# Altium PCB PCB1.PcbDoc
Units mm, origin at the board's own origin, x right, y up, seen from the top; angles counter-clockwise.
Board outline 100.25 x 100.25 mm, 2 copper layers (Top Layer, Bottom Layer); 62 components, 56 nets, 259 pads, 134 vias.
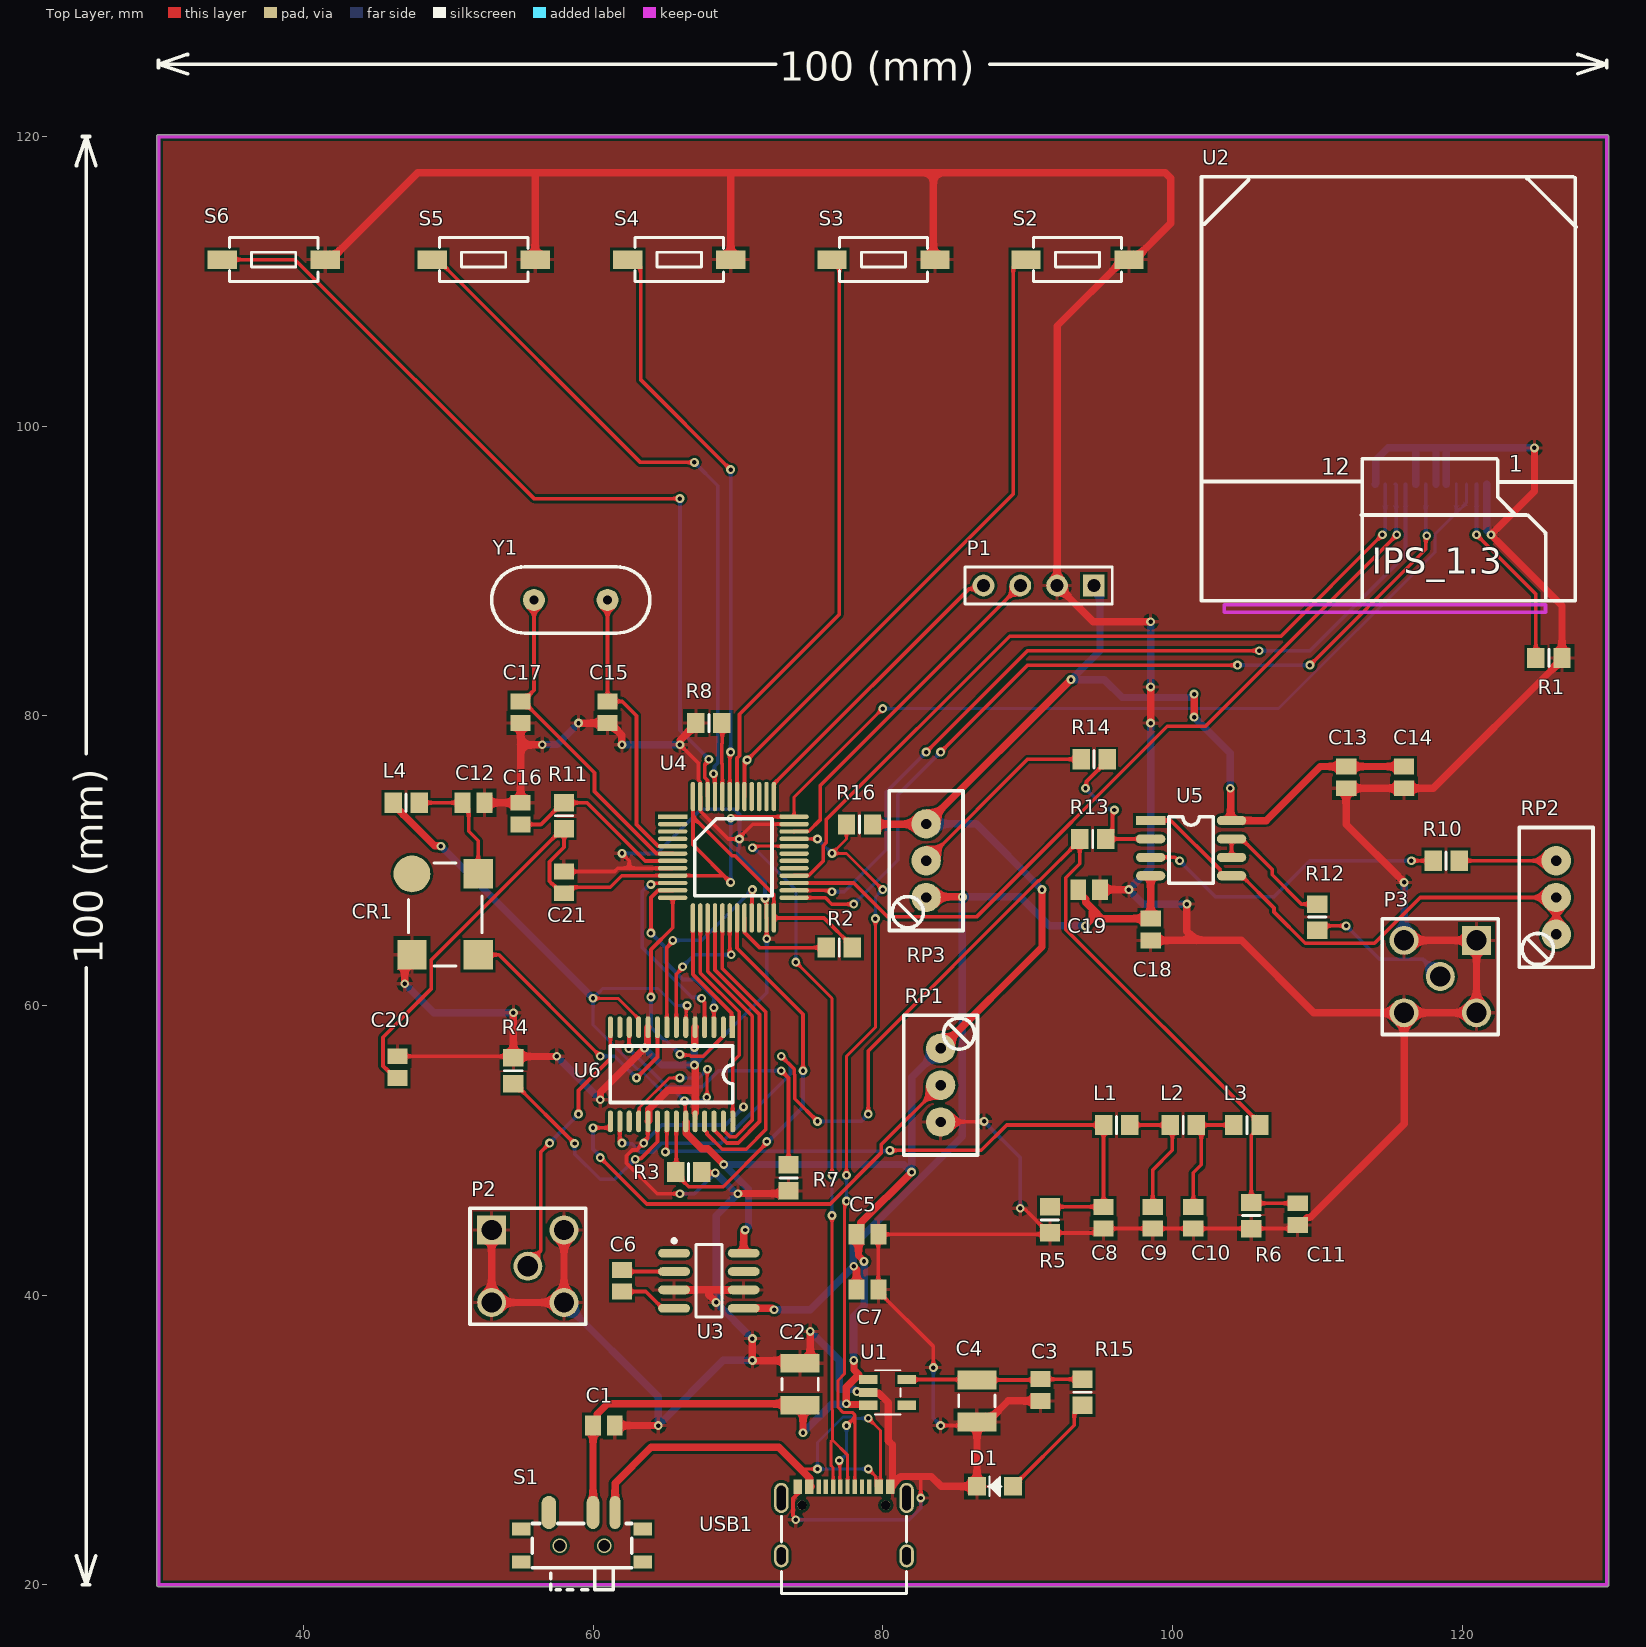
[diagram p0: Top Layer view]
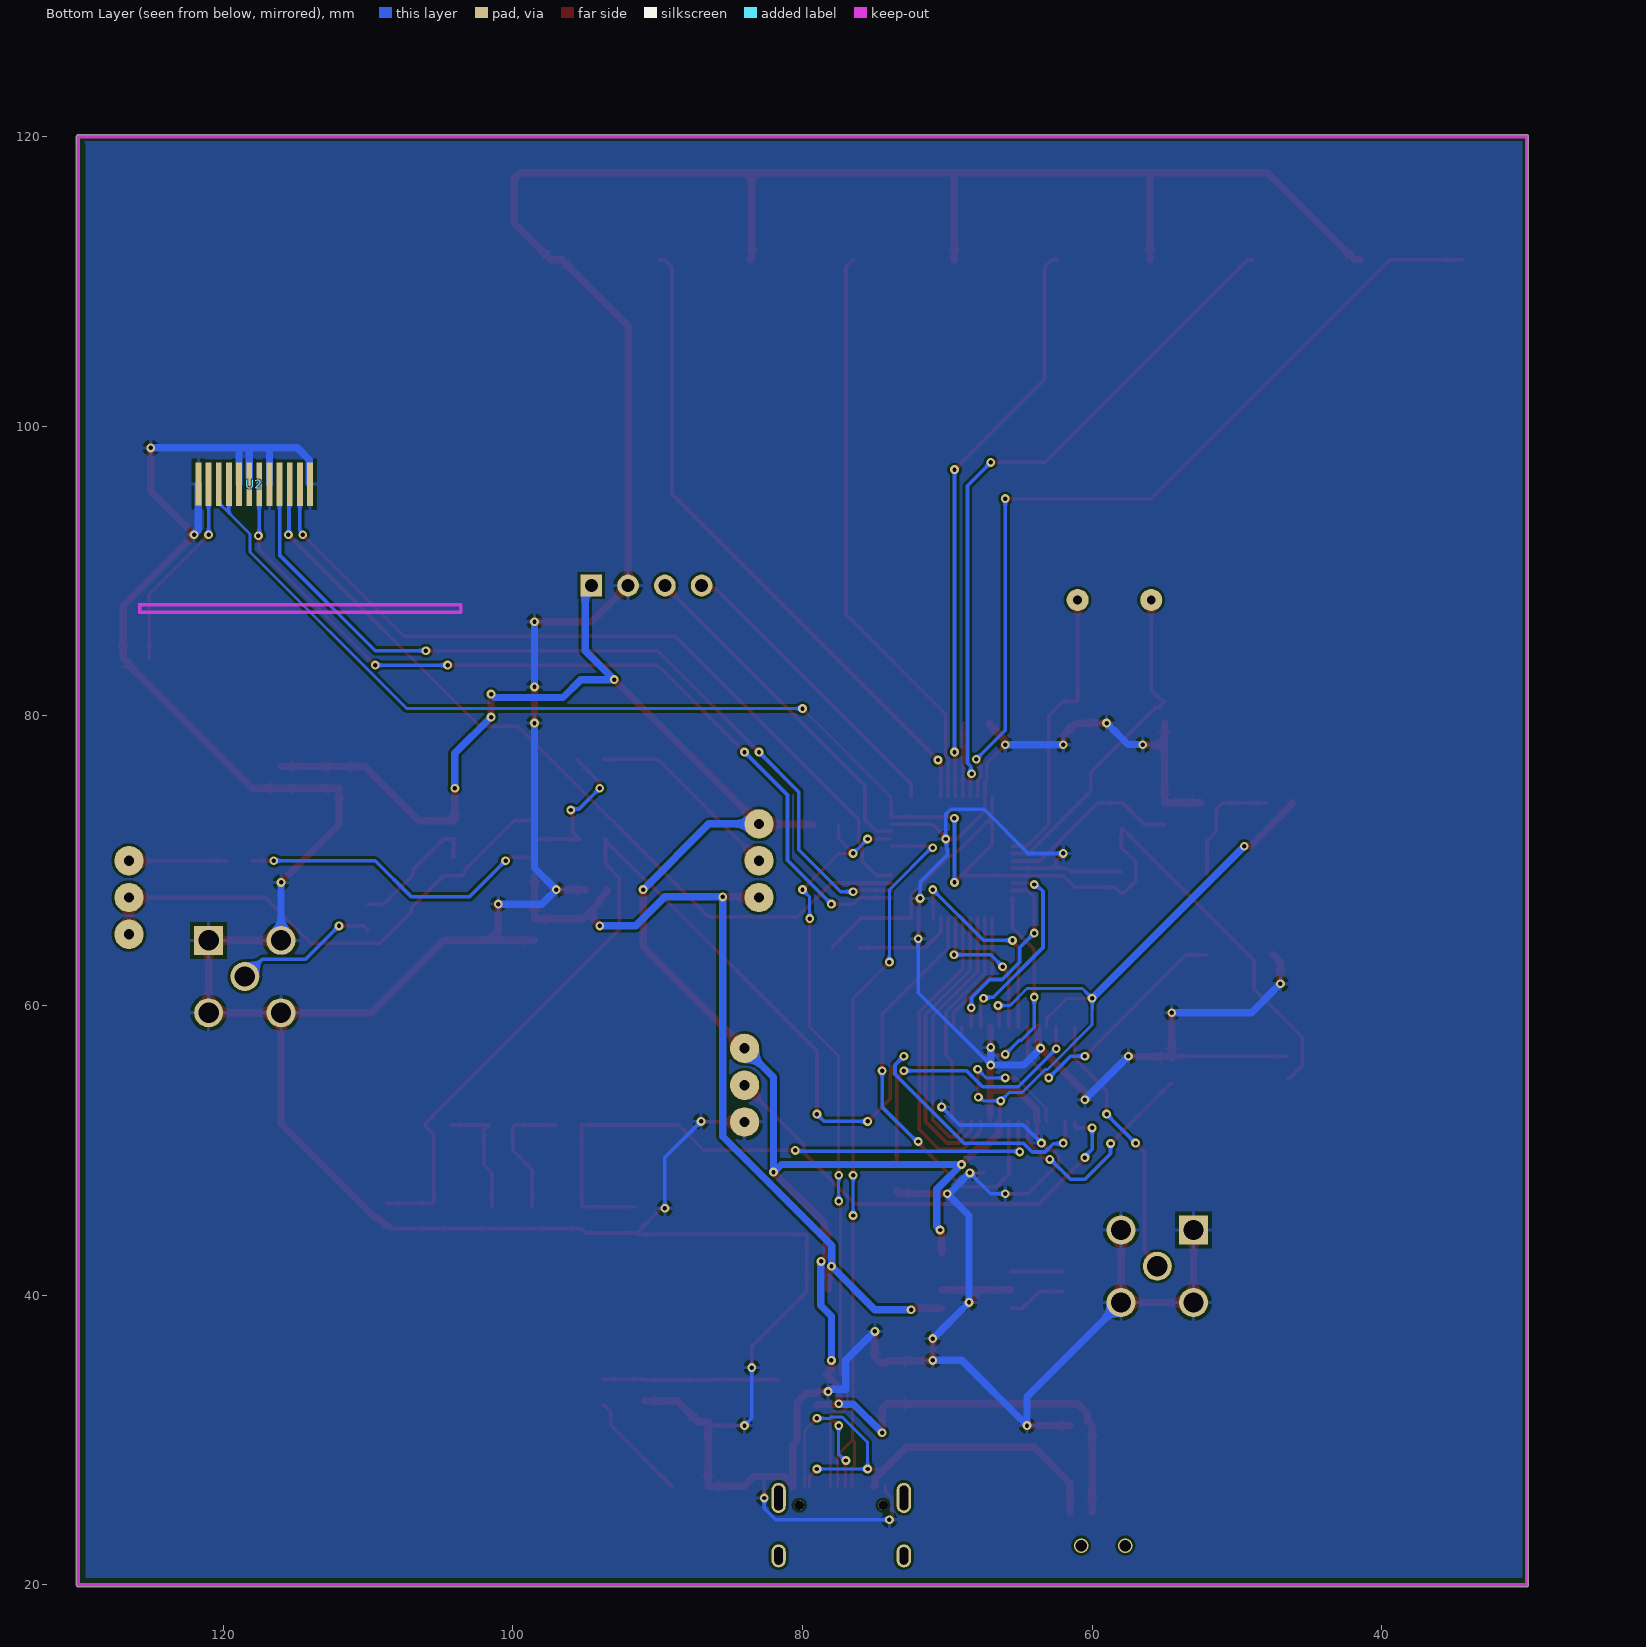
[diagram p1: Bottom Layer view, seen from below]

## Layer stack, top to bottom
Top Solder: solder mask 0.0102, Solder Resist, Dk 3.5
Top Layer: signal copper 0.0356
Dielectric 1: dielectric 0.32, FR-4, Dk 4.8
Bottom Layer: signal copper 0.0356
Bottom Solder: solder mask 0.0102, Solder Resist, Dk 3.5

## Board outline
29.873,20 ccw(c30,20) 30,19.873 130,19.873 ccw(c130,20) 130.127,20 130.127,120 ccw(c130,120) 130,120.127 30,120.127 ccw(c30,120) 29.873,120

## Design rules (kind name [scope] priority, off if disabled: settings)
Clearance [All] p1: gap=0.178 ignorepadtopadclearanceinfootprint=FALSE
PolygonConnect [All] p1: connectstyle=Relief reliefconductorwidth=0.254 reliefentries=4 polygonreliefangle="90 Angle" airgapwidth=0.254
RoutingVias [All] p1: holewidth=0.305 width=0.61 viastyle="Through Hole" minholewidth=0.305 minwidth=0.61 maxholewidth=0.305 maxwidth=0.61
SolderMaskExpansion [All] p1: expansion=0.102 istentingtop=FALSE
Width [All] p1: maxlimit=0.508 minlimit=0.203 preferedwidth=0.203
30 further rules are at their usual default settings.

## Components (designator, comment, footprint, x,y, rotation, side; value= is the part's Value field where it differs from the comment)
C1 "Cap104" C0805 60.75,31 r180 top
C2 "Cap Pol1 22UF" C1210_N 74.3,33.85 r90 top
C3 "Cap 104" C0805 90.9,33.45 r90 top
C4 "Cap Pol1 22UF" C1210_N 86.5,32.7 r270 top
C5 "Cap 106" C0805 78.95,44.2 r180 top
C6 "106" C0805 62,41 r90 top
C7 "Cap 106" C0805 78.95,40.4 r180 top
C8 "Cap 33pF" C0805 95.25,45.35 r90 top
C9 "Cap 22pF" C0805 98.65,45.35 r90 top
C10 "Cap 22pF" C0805 101.45,45.35 r90 top
C11 "Cap 22pF" C0805 108.65,45.6 r90 top
C12 "Cap 104" C0805 51.75,74 r0 top
C13 "106" C0805 112,75.75 r270 top
C14 "106" C0805 116,75.75 r270 top
C15 "Cap 20pF" C0805 61,80.25 r90 top
C16 "Cap 104" C0805 55,73.25 r270 top
C17 "Cap 20pF" C0805 55,80.25 r90 top
C18 "Cap" C0805 98.5,65.25 r270 top
C19 "Cap" C0805 94.25,68 r0 top
C20 "104" C0805 46.5,55.75 r270 top
C21 "104" C0805 58,68.5 r270 top
CR1 "30MHZ" CRYSTAL-SMT-5X7 47.5,69.088 r270 top
D1 "LED2" D0805+ 89,26.8 r180 top
L1 "Inductor 470mH" 6-0805_N 96.15,51.75 r0 top
L2 "Inductor 390nH" 6-0805_N 100.75,51.75 r0 top
L3 "Inductor 390nH" 6-0805_N 105.15,51.75 r0 top
L4 "Inductor" 6-0805_N 47.1,74 r180 top
P1 "Header 4" HDR1X4 94.58,89 r180 top
P2 "SMA" SMA-KE 55.5,42 r90 top
P3 "SMA" SMA-KE 118.5,62 r0 top
R1 "Res2 10" 6-0805_N 126,84 r180 top
R2 "10K" 6-0805_N 77,64 r0 top
R3 "10K" 6-0805_N 66.6,48.5 r0 top
R4 "25" 6-0805_N 54.5,55.5 r270 top
R5 "Res 200" 6-0805_N 91.55,45.2 r90 top
R6 "Res 200" 6-0805_N 105.45,45.5 r90 top
R7 "3.9K" 6-0805_N 73.5,48.1 r90 top
R8 "10K" 6-0805_N 68,79.5 r0 top
R10 "49.9" 6-0805_N 118.9,70 r0 top
R11 "10K" 6-0805_N 58,73.1 r270 top
R12 "49.9" 6-0805_N 110,66.1 r270 top
R13 "49.9" 6-0805_N 94.5,71.5 r0 top
R14 "49.9" 6-0805_N 94.6,77 r0 top
R15 "Res2 10K" 6-0805_N 93.8,33.3 r90 top
R16 "10K" 6-0805_N 78.4,72.5 r180 top
RP1 "POT2" VR7 84,54.5 r90 top
RP2 "1K" VR7 126.5,67.46 r270 top
RP3 "10K" VR7 83,70 r270 top
S1 "SW SPDT" SW-SPDT-7P 61.524,25 r180 top
S2 "KEY" SW-MINI 96.5,111.5 r180 top
S3 "KEY" SW-MINI 83.104,111.5 r180 top
S4 "KEY" SW-MINI 69,111.5 r180 top
S5 "KEY" SW-MINI 55.5,111.5 r180 top
S6 "KEY" SW-MINI 41,111.5 r180 top
U1 "XC6219B332" SOT23-5L 79,33.289 r270 top
U2 "1.3寸TFT液晶" 1.3-TFT-TPS 121.709,96.008 r270 top
U3 "ICL7660" SO8_N 68,41 r0 top
U4 "STM32F103C8" TQFP-48 65.5,73.032 r0 top
U5 "OPA2690" SO-8 98.5,72.77 r0 top
U6 "AD9851" TSSOP28 69.65,58.5 r270 top
USB1 "TYPE-C" TYPE-C 81.65,22 r180 top
Y1 "XTAL" XTAL2 58.46,88 r0 top

## Footprints (in the part's own frame and the unit in brackets; to place one, negate y for a bottom-side part, rotate by r counter-clockwise, add the part's x,y. Pads: shape width x height; smd on the part's side, far side on the other; paste and mask are expansions set on the pad)
1.3-TFT-TPS [mm]
  rect 3x0.4 smd far side: 1(0,0) 2(0.008,-0.709) 3(0.008,-1.409) 4(0.008,-2.109) 5(0.008,-2.809) 6(0.008,-3.509) 7(0.008,-4.209) 8(0.008,-4.909) 9(0.008,-5.609) 10(0.008,-6.309) 11(0.008,-7.009) 12(0.008,-7.709)
  Keep-Out Layer lines w0.254: 8.847,-18.123 8.339,-18.123 8.339,4.051 8.847,4.051 8.847,-18.123
  silkscreen extent -21.22,-19.72 8.06,6.16
6-0805_N [mm]
  rect 1.2x1.4 smd: 1(-0.9,0) 2(0.9,0)
  silkscreen extent 0,-0.6 0,0.6, body extent -1.07,-0.7 1.07,0.7, height 0.7
C0805 [mm]
  rect 1.1x1.4 smd: 1(-0.75,0) 2(0.75,0)
  body extent -1.1,-0.73 1.1,0.72, height 1.4
C1210_N [mm]
  rect 1.3x2.7 smd: 1(-1.45,0) 2(1.45,0)
  silkscreen extent -0.4,-1.25 0.4,1.25, body extent -1.7,-1.35 1.7,1.35, height 1.5
CRYSTAL-SMT-5X7 [mil]
  round 100 smd: 1(0,0)
  rect 80x80 smd: 4(220,0) 5(220,180) 8(0,180)
  silkscreen extent -30,-10 250,190
D0805+ [mil]
  rect 50x50 smd: A(0,0) K(98,0)
  silkscreen extent 31,-27 68,27
HDR1X4 [mm]
  rect 1.5x1.5 hole 0.9: 1(0,0)
  round 1.5 hole 0.9: 2(2.54,0) 3(5.08,0) 4(7.62,0)
  silkscreen extent -1.27,-1.27 8.89,1.27
SMA-KE [mm]
  round 2 hole 1.4: 1(0,0) 3(2.5,-2.5) 4(-2.5,-2.5) 5(-2.5,2.5)
  rect 2x2 hole 1.4: 2(2.5,2.5)
  silkscreen extent -4,-4 4,4
SO8_N [mm]
  oval 2.2x0.6 smd: 1(-2.4,1.905) 2(-2.4,0.635) 3(-2.4,-0.635) 4(-2.4,-1.905) 5(2.4,-1.905) 6(2.4,-0.635) 7(2.4,0.635) 8(2.4,1.905)
  silkscreen extent -2.52,-2.5 0.9,2.88, body extent -2,-2.5 2,2.5, height 1.75
SO-8 [mil]
  rect 80x25 smd: 1(0,0)
  oval 80x25 smd: 2(0,-50) 3(0,-100) 4(0,-150) 5(220,-150) 6(220,-100) 7(220,-50) 8(220,0)
  silkscreen extent 50,-170 170,10
SOT23-5L [mil]
  rect 25x50 smd: 1(-35,0) 2(0,0) 3(35,0) 4(35,105) 5(-35,105)
  silkscreen extent -60,18 60,88
SW-MINI [mil]
  rect 80x50 smd: 1(-20,0) 2(260,0)
  silkscreen extent 0,-60 240,60
SW-SPDT-7P [mil]
  oval 30x90 smd: 1(0,0)
  oval 35x90 smd: 2(60,0)
  oval 40x90 smd: 3(180,0)
  rect 50x35 smd: 4(255,45) 5(255,135) 6(-75,135) 7(-75,45)
  silkscreen extent -45,30 225,210
TQFP-48 [mil]
  rect 80x12 smd: 1(0,0)
  oval 80x12 smd: 2(0,-20) 3(0,-40) 4(0,-60) 5(0,-80) 6(0,-100) 7(0,-120) 8(0,-140) 9(0,-160) 10(0,-180) 11(0,-200) 12(0,-220) 25(330,-220) 26(330,-200) 27(330,-180) 28(330,-160) 29(330,-140) 30(330,-120) 31(330,-100) 32(330,-80) 33(330,-60) 34(330,-40) 35(330,-20) 36(330,0)
  oval 12x80 smd: 13(55,-275) 14(75,-275) 15(95,-275) 16(115,-275) 17(135,-275) 18(155,-275) 19(175,-275) 20(195,-275) 21(215,-275) 22(235,-275) 23(255,-275) 24(275,-275) 37(275,55) 38(255,55) 39(235,55) 40(215,55) 41(195,55) 42(175,55) 43(155,55) 44(135,55) 45(115,55) 46(95,55) 47(75,55) 48(55,55)
  silkscreen extent 60,-215 270,-5
TSSOP28 [mm]
  rect 1.5x0.35 smd: 1(-0.011,-0.037)
  oval 1.5x0.35 smd: 2(0,-0.65) 3(0,-1.3) 4(0,-1.95) 5(0,-2.6) 6(0,-3.25) 7(0,-3.9) 8(0,-4.55) 9(0,-5.2) 10(0,-5.85) 11(0,-6.5) 12(0,-7.15) 13(0,-7.8) 14(0,-8.45) 15(6.5,-8.45) 16(6.5,-7.8) 17(6.5,-7.15) 18(6.5,-6.5) 19(6.5,-5.85) 20(6.5,-5.2) 21(6.5,-4.55) 22(6.5,-3.9) 23(6.5,-3.25) 24(6.5,-2.6) 25(6.5,-1.95) 26(6.5,-1.3) 27(6.5,-0.65) 28(6.5,0)
  silkscreen extent 1.3,-8.45 5.2,0
TYPE-C [mm]
  round 0.65 hole 0.65: 0(1.435,-3.5) 0(7.215,-3.5)
  oval 1x1.6 hole 0.6 slot 1.2 at 90 deg: 1(0,0) 2(8.65,0)
  oval 1x2.1 hole 0.6 slot 1.7 at 90 deg: 3(8.65,-4) 4(0,-4)
  rect 0.3x1 smd: A1(7.675,-4.79) A4(6.875,-4.79) A5(5.575,-4.79) A6(4.575,-4.79) A7(4.075,-4.79) A8(3.075,-4.79) A9(1.775,-4.79) A12(0.975,-4.79) B1(1.275,-4.79) B4(2.075,-4.79) B5(2.575,-4.79) B6(3.575,-4.79) B7(5.075,-4.79) B8(6.075,-4.79) B9(6.575,-4.79) B12(7.375,-4.79)
  silkscreen extent 0,-2.74 8.65,2.6
VR7 [mil]
  round 80 hole 28: 1(-100,0) 2(100,0) 3(0,0)
  silkscreen extent -190,-100 190,100
XTAL2 [mil]
  round 60 hole 24: 1(-100,0) 2(100,0)
  silkscreen extent -215,-90 215,90

## Part data
C1 C3 C6 C7 C8 C9 C10 C11 C12 C13 C14 C15 C16 C17 C20 C21: library part Cap, "Capacitor", LatestRevisionDate=17-Jul-2002, LatestRevisionNote="Re-released for DXP Platform.", PackageDescription="Radial Cap, Thru-Hole; 2 Leads; 0.3 in Pin Spacing", PackageReference=RAD-0.3, Published=8-Jun-2000, Publisher="Altium Limited"
C2 C4: library part "Cap Pol1", "Polarized Capacitor (Radial)", LatestRevisionDate=17-Jul-2002, LatestRevisionNote="Re-released for DXP Platform.", PackageDescription="Polarized Capacitor (Radial); 2 Leads", PackageReference=RB7.6-15, Published=8-Jun-2000, Publisher="Altium Limited"
C5: library part Cap, "106", LatestRevisionDate=17-Jul-2002, LatestRevisionNote="Re-released for DXP Platform.", PackageDescription="Radial Cap, Thru-Hole; 2 Leads; 0.3 in Pin Spacing", PackageReference=RAD-0.3, Published=8-Jun-2000, Publisher="Altium Limited"
C18 C19: "Capacitor", LatestRevisionDate=17-Jul-2002, LatestRevisionNote="Re-released for DXP Platform.", PackageDescription="Radial Cap, Thru-Hole; 2 Leads; 0.3 in Pin Spacing", PackageReference=RAD-0.3, Published=8-Jun-2000, Publisher="Altium Limited"
CR1: library part CRYSTAL-DIP8
D1: "Typical RED, GREEN, YELLOW, AMBER GaAs LED", LatestRevisionDate=17-Jul-2002, LatestRevisionNote="Re-released for DXP Platform.", PackageDescription="SM LED; 2 Flat Leads", PackageReference=3.2X1.6X1.1, PackageVersion=Feb-2002, Published=8-Jun-2000, Publisher="Altium Limited"
L1 L2 L3: library part Inductor, "Inductor", Code_IEC=1005, Code_JEITA=0402, LatestRevisionDate=29-May-2009, LatestRevisionNote="IPC-7351 Footprint Added.", PackageDescription="Chip Inductor", PackageReference=0402-A, Published=8-Jun-2000, Publisher="Altium Limited"
P1: "Header, 4-Pin", LatestRevisionDate=17-Jul-2002, LatestRevisionNote="Re-released for DXP Platform.", Publisher="Altium Limited"
R1 R2 R3 R4 R5 R6 R7 R8 R10 R11 R12 R13 R14 R15 R16: library part Res2, "Resistor", LatestRevisionDate=17-Jul-2002, LatestRevisionNote="Re-released for DXP Platform.", PackageDescription="Axial Device, Thru-Hole; 2 Leads; 0.4 in Pin Spacing", PackageReference=AXIAL-0.4, Published=8-Jun-2000, Publisher="Altium Limited"
RP1: "Potentiometer"
RP2 RP3: library part POT2, "Potentiometer"
S2 S3 S4 S5 S6: library part SW-PB, "Switch", LatestRevisionDate=17-Jul-2002, LatestRevisionNote="Re-released for DXP Platform.", PackageDescription="Switch; 2 Leads", PackageReference=SPST-2, Published=24-Mar-1999, Publisher="Altium Limited"
U1: library part XC6219
U4: "Flaah:64/RAM:20/IO:36", BOM名称=32位STM单片机, 学习资源=www.ooocke.com, 版权归属=源创客
Y1: "Crystal Oscillator", LatestRevisionDate=17-Jul-2002, LatestRevisionNote="Re-released for DXP Platform.", PackageDescription="Crystal, Thru-Hole; 2 Leads; Body 3.1 x 8.2 mm (Dia.xH)", PackageReference=R38, Published=8-Jun-2000, Publisher="Altium Limited"
L4: Code_IEC=1005, Code_JEITA=0402, LatestRevisionDate=29-May-2009, LatestRevisionNote="IPC-7351 Footprint Added.", PackageDescription="Chip Inductor", PackageReference=0402-A, Published=8-Jun-2000, Publisher="Altium Limited"

## Via types
v1: diameter 0.61, hole 0.305, Top Layer to Bottom Layer, 132 vias
v2: diameter 1, hole 0.8, Top Layer to Bottom Layer, 2 vias

## Nets (pads, with @x,y where several pads share a name; then routed paths per layer and width w, separated by ;. In a path a pad name is that pad's centre, name@x,y a point inside that pad or via, vN(x,y) a via of type N, cw(c..) or ccw(c..) an arc to the next point about the centre after c; other vN are vias at no path point)
+5: C1.2 C2.1 C5.2 C13.1 C14.1 L4.2 P1.1 R16.1 RP1.2 RP3.1 S1.2 U1.1 U1.3 U3.8 U5.8 U6.6 U6.11 U6.18 U6.23 | length 217.2
  Top Layer w0.203: v1(60,60.5) 61.725,60.5 63.15,59.075 U6.11 ; U6.18 63.178,52.028 63.178,52.916 65.263,55 v1(66,55) ; v1(66.313,53.418) 66.372,53.359 66.372,52.028 U6.23 U6.23@66.443,51.957 ; U6.6 66.428,58.528 66.428,59.928 v1(66.5,60) ; v1(67.852,53.664) 67.878,53.69 67.878,55.569 v1(67.904,55.596)
  Top Layer w0.508: L4.2 46.2,73.9 46.905,73.195 46.905,73.184 49.07,71.019 49.481,71.019 v1(49.5,71) ; S1.2 C1.2 60.296,31.296 60.296,31.796 61,32.5 74.2,32.5 C2.1 74.5,32.2 v1(74.5,30.5) ; U6.23@66.443,51.957 66.443,51.174 67.51,50.107 67.935,50.107 v1(69.021,49.021) ; U3.8 70.4,44.373 70.5,44.473 v1(70.5,44.5) ; v1(78,35.5) 78.019,35.481 78.019,34.841 78.351,34.51 77.491,33.649 v1(77.491,32.5) 77.518,32.5 77.569,32.449 78.951,32.449 U1.3 ; v1(78.71,42.332) 78.71,42.359 78.331,42.738 78.331,44.069 C5.2 78.496,44.496 78.496,44.996 v1(82,48.5) ; R16.1 79.32,72.52 82.98,72.52 RP3.1 83.02,72.54 92.98,82.5 v1(93,82.5) ; RP1.2 91,64.04 v1(91,68) ; v1(101.5,79.916) v1(101.5,81.5) ; v1(104,75) 104.019,74.981 104.019,72.829 104.078,72.77 U5.8 106.483,72.77 110.213,76.5 C13.1 C14.1
  Bottom Layer w0.203: v1(66,55) 67.309,55 v1(67.904,55.596) ; v1(66.5,60) 65.658,60 64.49,61.168 60.668,61.168 v1(60,60.5) 60,58.674 63.09,55.584 63.242,55.584 64.842,53.984 65.747,53.984 v1(66.313,53.418) 67.496,53.418 67.742,53.664 v1(67.852,53.664)
  Bottom Layer w0.508: v1(49.5,71) v1(60,60.5) ; v1(70.5,44.5) 70.5,44.527 70.737,44.764 70.737,47.305 v1(69.021,49.021) 81.452,49.021 81.973,48.5 v1(82,48.5) 82,55.04 RP1.2 ; v1(74.5,30.5) 76.481,32.481 77.471,32.481 v1(77.491,32.5) ; v1(78,35.5) 78,38.548 78.737,39.285 78.737,42.305 v1(78.71,42.332) ; RP3.1 86.46,72.54 v1(91,68) ; P1.1 95,88.58 95,84.5 v1(93,82.5) 95.298,82.5 96.535,81.263 101.236,81.263 101.473,81.5 v1(101.5,81.5) ; v1(101.5,79.916) 104,77.416 v1(104,75)
+5VIN: S1.1 USB1.A4 USB1.A9 USB1.B4 USB1.B9 | length 35.2
  Top Layer w0.203: 74.413,27.913 74.5,28 v1(75.5,28) ; v1(79,28) 79.527,27.473 79.527,26.838 USB1.B4 ; v1(79,31.5) 79.842,30.658 79.842,26.823 USB1.A9
  Top Layer w0.508: S1.1 61.524,27.024 64,29.5 72.826,29.5 74.413,27.913 74.971,27.355 74.971,26.894 USB1.B9
  Bottom Layer w0.203: v1(79,28) v1(75.5,28) 75.5,29.826 77.258,31.584 78.032,31.584 78.116,31.5 v1(79,31.5)
-5: C7.2 C18.1 C19.1 RP3.2 U3.5 U5.4 | length 61.3
  Top Layer w0.508: U3.5 72.378,39.095 72.473,39 v1(72.5,39) ; v1(77.997,41.998) 77.997,41.971 78.2,41.768 C7.2 ; RP3.2 83.04,67.5 v1(85.5,67.5) ; C19.1 93.5,67.85 94.018,67.332 94.018,67.121 94.57,66.57 ; v1(94,65.5) 94,65.527 94.454,65.981 94.454,66.454 94.57,66.57 ; U5.4 C18.1 95.139,66 94.57,66.57
  Bottom Layer w0.508: v1(72.5,39) 75,39 77.997,41.997 v1(77.997,41.998) 77.997,42.026 77.974,42.049 77.974,43.432 85.5,50.958 v1(85.5,67.5) 89.5,67.5 91.5,65.5 v1(94,65.5)
AD9850-D0: U4.10 U6.4 | length 13.9
  Top Layer w0.254: v1(64,68.358) 64.096,68.358 64.188,68.45 65.49,68.45 U4.10 ; v1(67.5,60.5) 67.5,60.404 67.7,60.204 U6.4
  Bottom Layer w0.254: v1(64,68.358) 63.904,68.358 63.615,68.07 63.57,68.07 63.39,67.89 63.39,63.999 66.821,60.568 67.432,60.568 v1(67.5,60.5)
AD9850-D1: U4.11 U6.3 | length 13
  Top Layer w0.254: v1(64,65) 64,67.454 64.488,67.942 65.49,67.942 U4.11 ; v1(68.343,59.843) 68.346,59.839 68.346,58.504 U6.3
  Bottom Layer w0.254: v1(64,65) 64.998,64.002 64.998,63.002 66.205,61.795 67.068,61.795 68.334,60.529 68.334,59.852 v1(68.343,59.843)
AD9850-D2: U4.12 U6.2 | length 16.6
  Top Layer w0.254: v1(64,60.584) 64,63.862 65.5,65.362 U4.12 ; v1(66,56.627) 66.065,56.562 66.686,56.562 66.747,56.5 67.604,56.5 68.83,57.726 68.83,57.729 69,57.899 U6.2
  Bottom Layer w0.254: v1(64,60.584) 64,58.5 64.902,57.598 65.029,57.598 v1(66,56.627)
AD9850-D3: U4.13 U6.1 | length 8.7
  Top Layer w0.254: U4.13 66.897,62.151 69.565,59.483 69.565,58.559 U6.1
AD9850-D4: U4.14 U6.28 | length 15.3
  Top Layer w0.254: U4.14 67.405,62.253 70.092,59.566 70.092,56.56 69.65,56.118 U6.28
AD9850-D5: U4.15 U6.27 | length 18.5
  Top Layer w0.254: U4.15 67.913,62.356 71,59.269 71,52.096 69.849,50.945 69.451,50.945 69.17,51.226 69.17,51.229 69,51.399 U6.27
AD9850-D6: U4.16 U6.26 | length 20.1
  Top Layer w0.254: U6.26 68.35,51.399 68.52,51.229 68.52,51.226 69.233,50.513 70.028,50.513 71.5,51.986 71.5,59.38 68.421,62.459 U4.16
AD9850-D7: U4.17 U6.25 | length 21.9
  Top Layer w0.254: U6.25 67.7,51.399 67.87,51.229 67.87,51.13 68.918,50.082 70.582,50.082 71.932,51.432 71.932,59.558 68.929,62.561 U4.17
D/C: U2.7 U4.25 | length 61.1
  Top Layer w0.254: U4.25 76.044,67.444 76.488,67 v1(78,67) ; v1(84,77.5) 90,83.5 v1(104.5,83.5) ; v1(109.5,83.5) 117.5,91.5 117.5,92.374 v1(117.563,92.437)
  Bottom Layer w0.254: v1(78,67) 81.034,70.034 81.034,74.534 v1(84,77.5) ; v1(104.5,83.5) v1(109.5,83.5) ; U2.7 117.5,92.5 v1(117.563,92.437)
D\D\S\R\S\T\: R3.1 U4.19 U6.22 | length 30.1
  Top Layer w0.254: U6.22 65.75,48.55 R3.1 65.7,48.4 66.605,47.495 68.995,47.495 72,50.5 v1(72,50.61) ; U4.19 69.945,63.956 74.5,59.401 v1(74.5,55.5)
  Bottom Layer w0.254: v1(72,50.61) 72.11,50.61 74.5,53 v1(74.5,55.5)
DDSFQUP: U4.21 U6.8 | length 15.1
  Top Layer w0.254: U6.8 65.1,64.004 65.5,64.404 v1(65.5,64.5) ; U4.21@70.971,66.037 U4.21 70.971,66.057 70.971,67.971 v1(71,68)
  Bottom Layer w0.254: v1(65.5,64.5) 67.5,64.5 v1(71,68)
DDSWCLK: U4.18 U6.7 | length 10.6
  Top Layer w0.254: U6.7 65.75,62.154 66.181,62.585 v1(66.181,62.681) ; U4.18 69.437,63.698 69.539,63.596 v1(69.539,63.5)
  Bottom Layer w0.254: v1(66.181,62.681) 67,63.5 v1(69.539,63.5)
FOUT: C11.2 L3.2 R6.2 R13.1 U6.16 | length 85.9
  Top Layer w0.254: U6.16 61.85,50.746 62,50.596 v1(62,50.5) ; v1(73,56.5) 73.89,55.61 73.89,55.247 73.932,55.206 73.932,53.568 v1(75.5,52) ; v1(79,52.5) 79,56.862 90.747,68.61 90.81,68.61 R13.1@93.6,71.4 ; R13.1 R13.1@93.6,71.4 ; C11.2 105.5,46.35 R6.2 105.45,51.05 106.05,51.65 L3.2 106.05,51.85 92.645,65.255 92.645,68.826 93.6,69.781 R13.1@93.6,71.4
  Bottom Layer w0.254: v1(62,50.5) 62.048,50.452 62.686,50.452 63.247,49.89 64.138,49.89 64.747,50.5 68.862,50.5 73.61,55.247 73.61,55.89 v1(73,56.5) ; v1(75.5,52) 78.5,52 v1(79,52.5)
GND: C1.1 C2.2 C3.1 C4.2 C5.1 C7.1 C8.1 C9.1 C10.1 C11.1 C12.2 C13.2 C14.2 C15.1 C16.1 C17.1 C18.2 C19.2 C20.1 C21.1 CR1.4 D1.K P1.2 P2.2 P2.3 P2.4 P2.5 P3.2 P3.3 P3.4 P3.5 R1.1 R3.2 R4.1 R5.1 R6.1 R7.1 R8.1 RP1.1 S2.1 S3.1 S4.1 S5.1 S6.1 U1.2 U2.1 U2.5 U2.6 U2.8 U2.12 U3.3 U3.6 U4.8 U4.23 U4.35 U4.47 U6.5 U6.10 U6.19 U6.24 USB1.A1 USB1.A12 USB1.B1 USB1.B12 | length 588.2
  Top Layer w0.254: C20.1 R4.1@54.4,56.5 ; C21.1 61.485,69.25 61.711,69.476 62.5,69.476 ; v1(62,70.5) 62.5,70 62.5,69.476 ; U6.19 63.782,51.982 63.782,50.878 63.5,50.596 v1(63.5,50.5) 63.47,50.5 63,50.03 62.713,50.03 62.312,49.628 62.312,49.123 64.435,47 v1(66,47) ; U4.8 62.5,69.476 ; v1(66,78) 67.278,76.722 67.278,75.569 67.395,75.451 67.395,74.439 U4.47 67.415,74.419 67.415,73.417 69.332,71.5 v1@70,71.5 ; U6.24 U6.24@67.05,52.601 ; R3.2 67.557,48.443 68.404,48.443 v1@68.424,48.463 ; v1(70.11,71.5) v1@70,71.5 ; v1(71.878,67.396) 71.878,67.3 71.967,67.211 71.967,66.057 U4.23 71.987,66.037 71.987,64.623 v1(72,64.61) ; U4.35 71.024,72.524 v1@70,71.5 ; v1(74,24.5) 74,24.596 73.805,24.791 73.805,25.97 74.275,26.44 USB1.B12 ; 82.5,27.482 82.633,27.349 v1(82.633,26) ; v1(83.5,35) 83.5,36.45 79.7,40.25 C7.1 C5.1 91.45,44.2 R5.1 ; v1(84,31) 86.25,31 C4.2 ; RP1.1 84.02,51.98 86.98,51.98 v1(87,52) ; v1(89.5,46) 89.568,45.932 89.818,45.932 91.45,44.3 R5.1 ; C11.1 108.4,44.6 R6.1 C10.1 C9.1 96.95,44.6 C8.1 94.95,44.3 R5.1
  Top Layer w0.508: S6.1 41.889,111.5 47.889,117.5 56,117.5 ; v1(47,61.5) 47,63 CR1.4 ; C12.2 C16.1 55,78 ; P2.2 P2.5 P2.4 P2.3 ; R4.1@54.4,56.5 54.419,56.481 R4.1@54.5,56.481 ; R4.1 R4.1@54.5,56.481 ; v1(54.5,59.5) R4.1@54.5,56.481 ; C17.1 55,78 ; S5.1 56.008,117.492 56,117.5 ; v1(56.5,78) 55,78 ; v1(57.5,56.5) 57.481,56.481 R4.1@54.5,56.481 ; v1(59,79.5) C15.1 61.15,79.5 61.981,78.669 61.981,78.019 v1(62,78) ; v1(60.5,53.5) 60.519,53.519 60.519,54.019 v1(63.557,57.057) ; C1.1 v1(64.5,31) ; v1@63.757,57.284 63.757,58.457 U6.10 ; U6.19 63.843,52.043 63.843,52.826 65.171,54.154 67.05,54.154 ; U3.3 68,40.365 ; 66.019,78.319 67.1,79.4 R8.1 ; v1(67,55.89) 67,55.863 67.05,55.813 67.05,54.154 ; v1(67,57.11) 67.019,57.129 67.019,58.469 U6.5 ; U6.24@67.05,52.601 67.05,54.154 ; v1@68.424,48.463 v1(68.443,48.443) ; v1(68.5,39.5) 68.5,39.527 68,40.027 68,40.365 ; S4.1 69.508,117.492 69.5,117.5 ; v1(70,47) 70.019,47.019 73.319,47.019 R7.1 ; U3.6 68,40.365 ; v1(71,37) v1(71,35.5) 71.019,35.481 74.119,35.481 C2.2 74.604,35.3 75,35.696 v1(75,37.5) ; v1(78.227,33.344) 78.247,33.325 78.964,33.325 79.063,33.226 79.738,33.226 80.375,32.588 80.375,29.962 80.675,29.662 USB1.A12@80.675,26.932 ; USB1.A12 USB1.A12@80.675,26.932 ; S3.1 83.5,111.612 83.5,117.5 ; C3.1 88.65,32.7 87.2,31.25 C4.2 86.511,31.239 D1.K 84.038,26.8 83.356,27.482 82.5,27.482 81.225,27.482 USB1.A12@80.675,26.932 ; C19.2 v1(97,68) ; C18.2 101.636,64.5 ; v1(98.5,79.5) v1(98.5,82) ; v1(98.5,86.5) 94.54,86.5 P1.2 92.04,106.913 96.627,111.5 S2.1 97.389,111.5 99.889,114 99.889,117.111 99.5,117.5 83.5,117.5 ; v1(101,67) 101,65.136 101.636,64.5 ; C11.1 108.8,44.85 109.318,45.368 109.529,45.368 116,51.839 P3.4 ; P3.5 P3.2 P3.3 P3.4 ; v1(116,68.5) 112,72.5 C13.2 C14.2 118.011,75 126.554,83.543 126.554,83.654 R1.1 126.9,87.6 v1(122,92.5) 125,95.5 v1(125,98.5) ; 56,117.5 69.5,117.5 ; 69.5,117.5 83.5,117.5 ; 101.636,64.5 104.771,64.5 109.771,59.5 P3.4
  Bottom Layer w0.254: v1(62,70.5) 64.406,70.5 67.45,73.544 69.76,73.544 70.117,73.187 70.117,71.507 v1(70.11,71.5) 70.042,71.432 70.042,70.828 70,70.786 70,70.387 71.878,68.509 v1(71.878,67.396) ; v1(63.5,50.5) 64.75,51.75 69.14,51.75 v1(70.39,53) ; v1(66,47) 67,47 v1(68.443,48.443) ; v1(67,55.89) 72,60.89 v1(72,64.61) ; v1(74,24.5) 81.838,24.5 82.633,25.294 v1(82.633,26) ; v1(83.5,35) 83.5,31.5 v1(84,31) ; v1(87,52) 89.5,49.5 v1(89.5,46)
  Bottom Layer w0.508: v1(47,61.5) 49,59.5 v1(54.5,59.5) ; v1(56.5,78) 56.519,78.019 57.519,78.019 v1(59,79.5) ; v1(57.5,56.5) v1(60.5,53.5) ; P2.4 64.5,33 v1(64.5,31) 69,35.5 v1(71,35.5) ; v1(62,78) v1(66,78) ; v1(63.557,57.057) 64.723,55.89 v1(67,55.89) v1(67,57.11) ; v1(68.443,48.443) 69.867,47.019 69.981,47.019 v1(70,47) 68.5,45.5 v1(68.5,39.5) v1(71,37) ; v1(75,37.5) 77,35.5 77,33.5 78.044,33.5 78.2,33.344 v1(78.227,33.344) ; v1(98.5,79.5) 98.5,69.5 v1(97,68) 98,67 v1(101,67) ; v1(98.5,82) v1(98.5,86.5) ; U2.12 114.054,96.054 114.054,97.665 114.889,98.5 116.945,98.5 ; P3.5 v1(116,68.5) ; U2.8 116.8,98.355 116.945,98.5 ; U2.6 118.2,98.3 118,98.5 ; U2.5 118.9,98.4 119,98.5 ; U2.1 121.709,92.818 122,92.527 v1(122,92.5) ; v1(125,98.5) 119,98.5 ; 116.945,98.5 118,98.5 ; 118,98.5 119,98.5
IOUTA: C8.2 L1.1 R5.2 U6.21 | length 42.5
  Top Layer w0.254: v1(65,49.89) 65,50.096 65.1,50.196 U6.21 ; v1(80.5,50) 86.812,50 88.562,51.75 L1.1 C8.2 R5.2
  Bottom Layer w0.254: v1(65,49.89) 65.055,49.945 80.445,49.945 v1(80.5,50)
IOUTB: R4.2 U6.20 | length 15.6
  Top Layer w0.254: R4.2 54.6,54.6 v1(58.727,50.473) ; v1(62.921,49.376) 62.989,49.444 63.306,49.444 64.45,50.588 U6.20
  Bottom Layer w0.254: v1(58.727,50.473) 58.727,49.773 60.5,48 61.5,48 62.876,49.376 v1(62.921,49.376)
KEY1: S2.2 U4.41 | length 45.4
  Top Layer w0.254: U4.41 70.463,74.439 70.463,76.802 70.612,76.951 v1(70.642,76.951) ; v1@70.527,77.027 70.718,77.027 89.007,95.316 89.007,110.992 89.515,111.5 S2.2
KEY2: S3.2 U4.42 | length 40.2
  Top Layer w0.254: U4.42 69.945,77.083 70.11,77.247 70.11,80.11 77,87 77,111 S3.2
KEY3: S4.2 U4.43 | length 40.3
  Top Layer w0.254: S4.2 62.777,111.5 63.285,110.992 63.285,103.215 v1(69.5,97) ; U4.43 69.447,74.439 69.447,77.447 v1(69.5,77.5)
  Bottom Layer w0.254: v1(69.5,77.5) v1(69.5,97)
KEY4: S5.2 U4.45 | length 47.8
  Top Layer w0.254: S5.2 49.277,111.5 63.277,97.5 v1(67,97.5) ; v1(68.319,76) 68.319,75.904 68.411,75.812 68.411,74.439 U4.45
  Bottom Layer w0.254: v1(67,97.5) 68.61,95.89 68.61,76.747 68.387,76.525 68.387,76.068 v1(68.319,76)
KEY5: S6.2 U4.46 | length 60
  Top Layer w0.254: S6.2 39.426,111.5 55.926,95 v1(66,95) ; U4.46 67.903,74.439 67.903,75.554 67.71,75.747 67.71,76.614 68,76.904 v1(68,77)
  Bottom Layer w0.254: v1(66,95) 66,79 v1(68,77)
NetC3_2: C3.2 C4.1 R15.2 U1.5 | length 12.2
  Top Layer w0.254: U1.5 86.472,34.178 C4.1 90.85,34.15 C3.2 R15.2
NetC6_1: C6.1 U3.4 | length 4.1
  Top Layer w0.254: C6.1 63.645,40.25 64.8,39.095 U3.4
NetC6_2: C6.2 U3.2 | length 3.6
  Top Layer w0.254: C6.2 62.115,41.635 U3.2
NetC9_2: C9.2 L1.2 L2.1 | length 9.1
  Top Layer w0.254: L1.2 L2.1 100,51.6 100,50 98.65,48.65 C9.2
NetC10_2: C10.2 L2.2 L3.1 | length 8.6
  Top Layer w0.254: C10.2 101.45,48.45 102,49 102,51.4 L2.2 L3.1
NetC12_1: C12.1 CR1.8 L4.1 | length 8.4
  Top Layer w0.254: L4.1 C12.1 51.423,73.577 51.423,72.027 52.072,71.378 CR1.8
NetD1_A: D1.A R15.1 | length 7.6
  Top Layer w0.254: D1.A 93.227,31.027 93.227,31.927 93.7,32.4 R15.1
NetP2_1: P2.1 U6.14 | length 18.9
  Top Layer w0.254: P2.1 55.5,42.187 56.383,43.07 56.383,49.883 v1(57,50.5) ; v1(59,52.5) 59,54.138 61.2,56.338 U6.14
  Bottom Layer w0.254: v1(57,50.5) v1(59,52.5)
NetP3_1: P3.1 R12.2 | length 10.1
  Top Layer w0.254: R12.2 110.3,65.5 v1(112,65.5)
  Bottom Layer w0.254: v1(112,65.5) 114.305,63.195 117.305,63.195 P3.1
NetR1_2: R1.2 U2.2 | length 13.7
  Top Layer w0.254: v1(121,92.5) 125.1,88.4 R1.2
  Bottom Layer w0.254: v1(121,92.5) U2.2
NetR2_1: R2.1 U4.20 | length 7.1
  Top Layer w0.254: U4.20 70.463,66.037 70.463,65.035 71.498,64 R2.1
NetR7_2: R7.2 U6.12 | length 20.3
  Top Layer w0.254: v1(62.479,57.021) 62.49,57.031 62.49,58.49 U6.12 ; v1(73,55.5) 73.5,55 R7.2
  Bottom Layer w0.254: v1(62.479,57.021) 65.11,54.39 67.561,54.39 68.671,55.5 v1(73,55.5)
NetR8_2: R8.2 U4.44 | length 5.1
  Top Layer w0.254: R8.2 68.929,79.471 68.929,78.107 68.89,78.068 68.89,76.711 68.929,76.673 U4.44
NetR10_1: R10.1 U5.3 | length 21.7
  Top Layer w0.254: U5.3 100.174,70.23 100.404,70 v1(100.5,70) ; v1(116.5,70) R10.1
  Bottom Layer w0.254: v1(100.5,70) 103,67.5 107,67.5 109.5,70 v1(116.5,70)
NetR10_2: R10.2 RP2.1 | length 6.7
  Top Layer w0.254: R10.2 RP2.1
NetR12_1: R12.1 U5.6 U5.7 | length 9.3
  Top Layer w0.254: U5.6 U5.7 104.786,71.5 106.889,69.397 106.889,69.03 108.919,67 R12.1
NetR13_2: R13.2 R14.2 U5.2 | length 10.6
  Top Layer w0.254: v1(94,75) 94.068,75.068 94.068,75.468 95.5,76.9 R14.2 ; v1(96,73.5) 96,73.404 95.873,73.277 95.873,71.973 R13.2 U5.2
  Bottom Layer w0.254: v1(94,75) 95.432,73.568 95.932,73.568 v1(96,73.5)
NetR14_1: R14.1 RP3.3 | length 13.6
  Top Layer w0.254: RP3.3 90,77 R14.1
NetRP1_3: RP1.3 U6.15 | length 32.4
  Top Layer w0.254: v1(60,51.555) 61.156,51.555 61.2,51.599 U6.15 ; v1(60.5,49.5) 63.705,46.295 76.373,46.295 79.89,49.813 79.89,50.39 RP1.3
  Bottom Layer w0.254: v1(60,51.555) 60,50.096 60.5,49.596 v1(60.5,49.5)
NetRP2_2: RP2.2 RP2.3 U5.1 U5.5 | length 35.6
  Top Layer w0.254: U5.1 99.897,72.77 103.317,69.35 103.317,69.136 103.493,68.96 U5.5 104.786,68.96 107.017,66.73 107.017,66.452 109.174,64.295 113.95,64.295 117.115,67.46 RP2.3 RP2.2
NRST: C16.2 R11.1 U4.7 | length 12.8
  Top Layer w0.254: C16.2 56.4,72.5 57.9,74 R11.1 59.59,74 63.606,69.984 U4.7
OSC-IN: C15.2 U4.5 Y1.2 | length 20
  Top Layer w0.254: Y1.2 C15.2 62,81 63,80 63,72.498 64.488,71.01 65.49,71.01 U4.5
OSC-OUT: C17.2 U4.6 Y1.1 | length 23.1
  Top Layer w0.254: Y1.1 55.92,81.77 55.15,81 C17.2 55.423,80.577 55.604,80.577 60.106,76.075 60.106,74.781 64.385,70.502 65.49,70.502 U4.6
R\E\S\: U2.11 U4.28 | length 55.5
  Top Layer w0.254: U4.28 73.892,68.978 74.894,68.978 75.89,69.974 75.89,71.028 76.11,71.247 76.11,72.841 88.769,85.5 107.5,85.5 v1(114.5,92.5)
  Bottom Layer w0.254: v1(114.5,92.5) 114.5,92.596 114.7,92.796 U2.11
SCL: U2.9 U4.26 | length 59.1
  Top Layer w0.254: U4.26 76.302,67.952 76.404,67.85 v1(76.5,67.85) ; v1(83,77.5) 90,84.5 v1(106,84.5)
  Bottom Layer w0.254: v1(76.5,67.85) 77.35,67.85 80.25,70.75 80.25,74.75 v1(83,77.5) ; v1(106,84.5) 109.5,84.5 116.1,91.1 U2.9
SCLK: P1.4 U4.37 | length 21.1
  Top Layer w0.254: U4.37 72.485,75.293 85.954,88.762 86.728,88.762 P1.4@87.038,89.072
SDA: U2.10 U4.27 | length 57
  Top Layer w0.254: U4.27 77.998,68.46 80.318,66.139 86.508,66.139 99.655,79.286 102.286,79.286 115.49,92.49 v1(115.49,92.5)
  Bottom Layer w0.254: U2.10 115.45,95.95 115.45,92.54 v1(115.49,92.5)
SDIO: P1.3 U4.34 | length 24
  Top Layer w0.254: U4.34 73.892,72.026 74.894,72.026 75.678,72.81 75.678,75.178 P1.3
SYSCLK: CR1.5 U6.9 | length 18.5
  Top Layer w0.254: CR1.5 53.5,63.5 v1(60.5,56.5) ; v1(63,55) 64.45,56.45 U6.9
  Bottom Layer w0.254: v1(60.5,56.5) 61.5,56.5 v1(63,55)
USB-D-N: U4.32 USB1.A7 USB1.B7 | length 53.1
  Top Layer w0.203: v1(71,70.89) 71.11,70.89 71.22,71 U4.32 ; v1(74,63) 76.5,60.5 v1(76.5,48.284) ; v1(76.5,45.5) 76.5,32.126 76.537,32.088 76.537,30 ; USB1.B7 76.575,28.099 76.416,28.258 76.416,29.878 76.537,30 ; USB1.A7 77.575,28.066 77.584,28.075 77.584,28.953 76.537,30
  Bottom Layer w0.203: v1(71,70.89) 71.11,70.89 74,68 v1(74,63) ; v1(76.5,45.5) v1(76.5,48.284)
USB-D-P: R16.2 U4.33 USB1.A6 USB1.B6 | length 58.6
  Top Layer w0.203: U4.33 73.886,71.504 75.496,71.504 v1(75.5,71.5) ; v1(77,28.584) 77.037,28.547 77.037,26.828 USB1.A6 ; v1(77.5,31) 78.075,31.575 ; v1(77.5,46.5) 77.5,46.39 77.371,46.261 77.371,34.576 76.907,34.112 76.907,32.258 77.249,31.916 77.902,31.916 78.075,31.743 78.075,31.575 ; v1(77.5,48.284) 77.5,56.5 79.5,58.5 v1(79.5,66) ; R16.2 77.5,71.5 v1(76.5,70.5) 77.5,70.5 v1(80,68) ; USB1.B6 78.075,31.575
  Bottom Layer w0.203: v1(75.5,71.5) v1(76.5,70.5) ; v1(77,28.584) 77.067,28.584 77.5,29.018 v1(77.5,31) ; v1(77.5,46.5) v1(77.5,48.284) ; v1(79.5,66) 79.5,67.5 v1(80,68)
VCC: C20.2 C21.2 R2.2 R11.2 U2.3 U2.4 U4.9 U4.24 U4.36 U4.48 | length 132.4
  Top Layer w0.203: U4.36 73.882,74.382 v1(80,80.5)
  Top Layer w0.254: C20.2 46.35,55 45.705,55.645 45.674,55.645 45.495,55.824 45.495,57.809 48.821,61.135 48.821,63.121 57.9,72.2 R11.2 58,70.931 56.995,69.926 56.995,68.574 57.175,68.394 57.206,68.394 57.85,67.75 C21.2 58.423,68.173 61.195,68.173 61.99,68.968 U4.9 68.998,68.968 69.466,68.5 v1(69.5,68.5) 66.897,71.103 66.897,73.032 ; U4.48 66.897,73.032 ; v1(69.507,72.934) 69.604,72.934 69.701,73.032 U4.36 ; R2.2 77.9,64.1 75.953,66.047 U4.24 72.488,66.05 72.488,67.649 69.796,70.34 69.589,70.34 66.897,73.032
  Bottom Layer w0.203: v1(80,80.5) 107.326,80.5 118.147,91.321 118.147,92.547 119.6,94 ; U2.4 119.6,94 ; U2.3 120.3,94.7 119.6,94
  Bottom Layer w0.254: v1(69.5,68.5) 69.5,72.927 v1(69.507,72.934)
pads on no net: CR1.1 S1.3 S1.4 S1.5 S1.6 S1.7 U1.4 U3.1 U3.7 U4.1 U4.2 U4.3 U4.4 U4.22 U4.29 U4.30 U4.31 U4.38 U4.39 U4.40 U6.13 U6.17 USB1.0 USB1.1 USB1.2 USB1.3 USB1.4 USB1.A5 USB1.A8 USB1.B5 USB1.B8
copper on no net:
  other v2: 57.714,22.714 60.762,22.714

## Polygon pours and split planes (outlines as drawn)
GND on Top Layer "1" (solid, remove dead copper, pour order 1): 30,120 130,120 130,20 30,20
GND on Top Layer "1" (solid, remove dead copper, pour order 0): 30,120
GND on Bottom Layer "1" (solid, remove dead copper, pour order 2): 30,120 130,120 129.5,119.5 129.5,20.5 30,20.5

## Keep-outs
Keep-Out Layer:
  lines w0.254: 38,120 30,120 ; 30,120 30,20 130,20 130,120 30,120

## Silkscreen, mask and mechanical layers (free items; w line width, h text height)
Top Overlay:
  lines w0.254: 24.333,22 25,20 ; 24.333,118 25,120 ; 24.746,20 25.254,20 ; 24.746,120 25.254,120 ; 25,62.596 25,20 ; 25,77.404 25,120 ; 25.667,22 25,20 ; 25.667,118 25,120 ; 30,124.746 30,125.254 ; 32,124.333 30,125 ; 32,125.667 30,125 ; 72.596,125 30,125 ; 87.404,125 130,125 ; 128,124.333 130,125 ; 128,125.667 130,125 ; 130,124.746 130,125.254
  text "100 (mm)" at 72.85,123.848 h2
  text "100 (mm)" at 26.152,62.85 h2 r90

## Text inside footprints (layer, text, board x,y; h text height)
U2: Top Overlay "IPS_1.3" at 113.771,89.828 h1.82; Top Overlay "1" at 123.22,96.838 h1.14; Top Overlay "12" at 110.292,96.66 h1.14